# EAGLE board TPA6138A2_headphone_drvr (EAGLE 5.11)
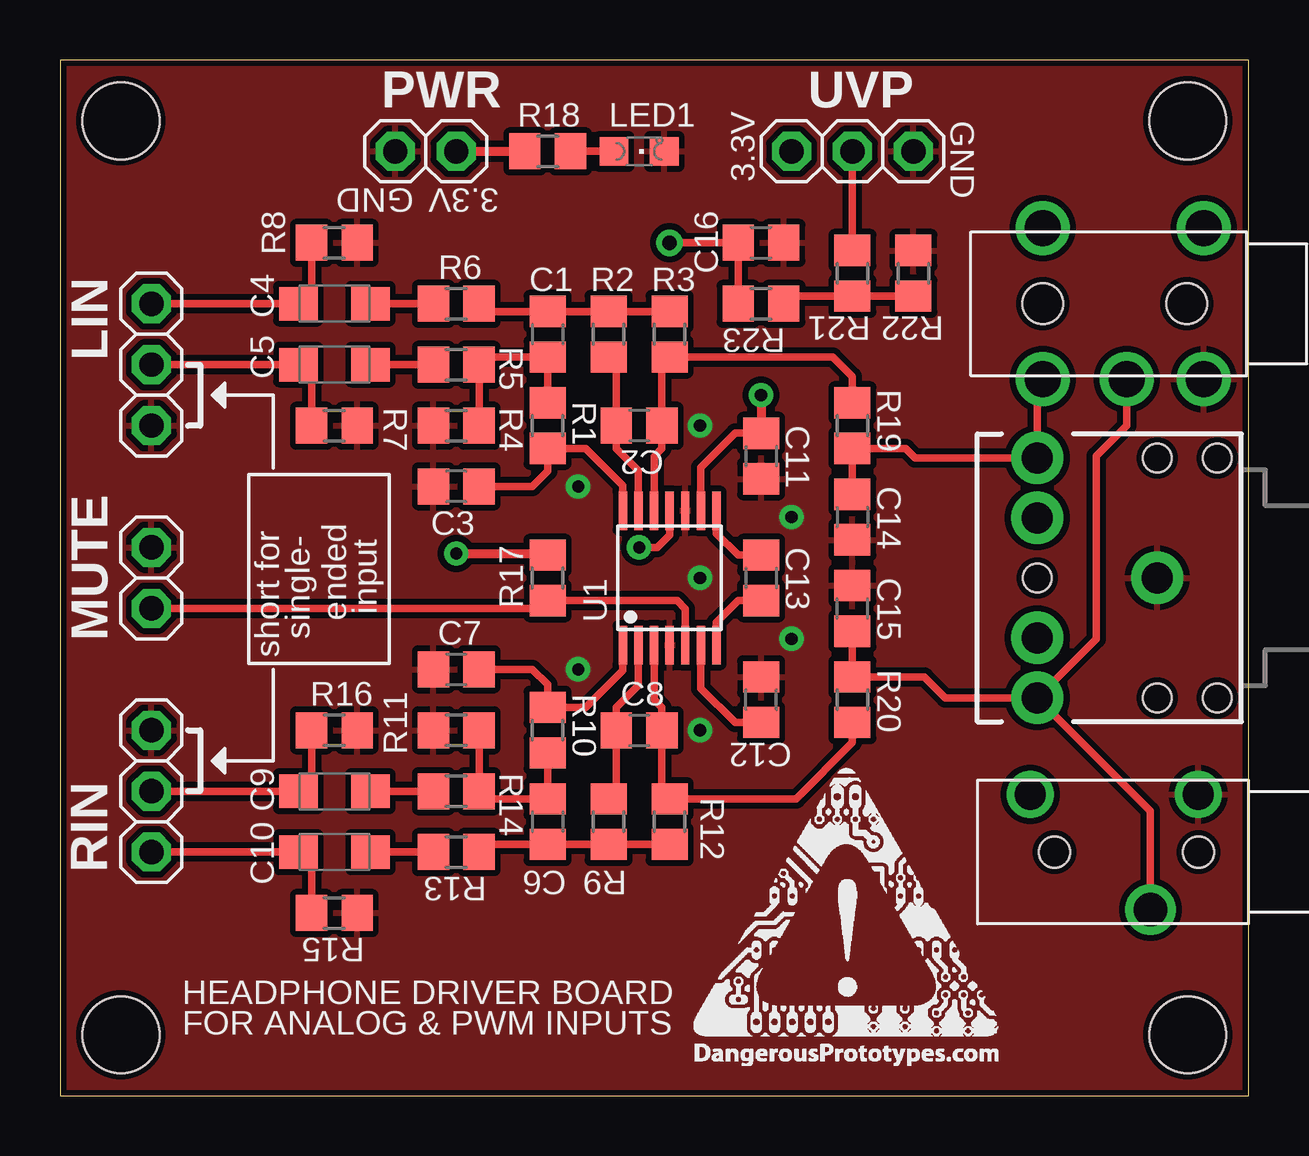
[diagram p0: board, top side]
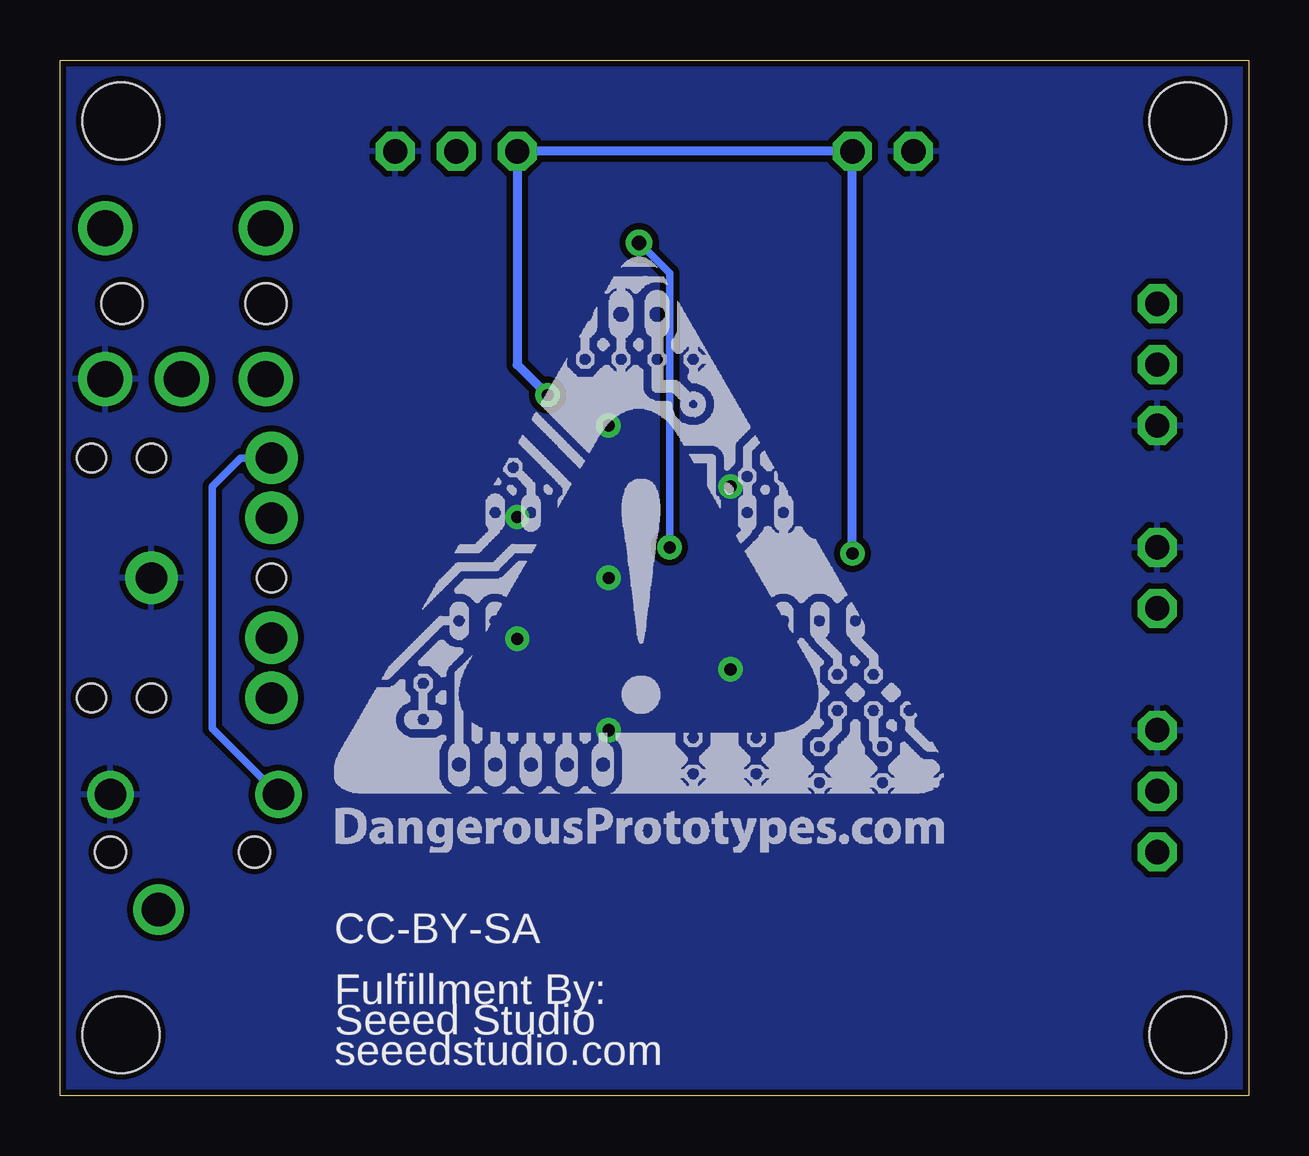
[diagram p1: board, bottom side, seen from below]

Size 49.53 x 43.18 mm. Coordinates in mm from the lower left corner, seen from the top.
Outline: 0,0 49.53,0 49.53,43.18 0,43.18 0,0
Copper layers (1*16): Top 0.035mm / dielectric 1.5mm / Bottom 0.035mm
Design rules "SparkFun": minimum track width 8mil, minimum drill 20mil, track to track 8mil, track to pad 8mil, pad to pad 8mil, via to via 8mil, smd to smd 8mil, copper to edge 10mil, drill to drill 8mil, minimum pad ring 12mil, minimum via ring 10mil, stop-mask expansion 4mil, vias tented up to drill 25mil, thermal gap 10mil
Holes 3.2 mm at 2.54,40.64 46.99,40.64 2.54,2.54 46.99,2.54

## Footprints (pad centres in the part's own frame; a part is rotated, then mirrored left to right if it is on the bottom)
C805 = smd 1.3 x 1.5: 1 -0.95,0; 2 0.95,0
SMC_A = smd 1.6 x 1.4: + -1.5,0; - 1.5,0
AUDIO-JACK = drill 1.3 pad 2.184 round: RING 5,5; RSH 5,2.5; SLEEVE 0,0; TIP 5,-5; TSH 5,-2.5 | hole 1.2: 0,5; -2.5,5; -2.5,-5; 0,-5; 5,0
AUDIO-JACK2 = drill 1.3 round: 1 2.1,-2.4; 3 9.1,-2.4 | drill 1.4 round: 2 4.1,2.4 | hole 1.3: 2.1,0; 8.1,0
AUDIO-JACK1 = drill 1.5 round: 1 -3.2,3.15; 1A -3.2,-3.15; 2 0,3.15; 3 3.5,3.15; 3A 3.5,-3.15 | hole 1.7: -2.5,0; 3.5,0
LED-805 = smd 1.2 x 1.2: A 0,-1.05; C 0,1.05
1X03 = drill 1.016 octagon: 1 -2.54,0; 2 0,0; 3 2.54,0
1X02 = drill 1.016 octagon: 1 -1.27,0; 2 1.27,0
R805 = smd 1.3 x 1.5: 1 -0.95,0; 2 0.95,0
TSSOP14 = smd 0.35 x 1.6: 1 -1.95,-2.8; 2 -1.3,-2.8; 3 -0.65,-2.8; 4 0,-2.8; 5 0.65,-2.8; 6 1.3,-2.8; 7 1.95,-2.8; 8 1.95,2.8; 9 1.3,2.8; 10 0.65,2.8; 11 0,2.8; 12 -0.65,2.8; 13 -1.3,2.8; 14 -1.95,2.8

## Placement (x,y rotation side)
C1  180pF  [C805]  20.32,31.75 270 top
C2  47pF  [C805]  24.13,27.94 180 top
C3  47pF  [C805]  16.51,25.4 180 top
C4  2.2uF  [SMC_A]  11.43,33.02 0 top
C5  2.2uF  [SMC_A]  11.43,30.48 0 top
C6  180pF  [C805]  20.32,11.43 270 top
C7  47pF  [C805]  16.51,17.78 0 top
C8  47pF  [C805]  24.13,15.24 0 top
C9  2.2uF  [SMC_A]  11.43,12.7 0 top
C10  2.2uF  [SMC_A]  11.43,10.16 0 top
C11  1uF  [C805]  29.21,26.67 270 top
C12  1uF  [C805]  29.21,16.51 90 top
C13  1uF  [C805]  29.21,21.59 270 top
C14  1nF  [C805]  33.02,24.13 270 top
C15  1nF  [C805]  33.02,20.32 90 top
C16  [C805]  29.21,35.56 0 top
HEADPHONE  [AUDIO-JACK]  45.72,21.59 180 top
J1  AUDIO-JACK2  [AUDIO-JACK2]  49.53,10.16 180 top
J2  AUDIO-JACK1  [AUDIO-JACK1]  44.45,33.02 180 top
LED1  [LED-805]  24.13,39.37 270 top
LIN  [1X03]  3.81,30.48 270 top
MUTE  [1X02]  3.81,21.59 90 top
PWR  [1X02]  15.24,39.37 180 top
R1  43K  [R805]  20.32,27.94 270 top
R2  43K  [R805]  22.86,31.75 270 top
R3  30K  [R805]  25.4,31.75 270 top
R4  30K  [R805]  16.51,27.94 0 top
R5  15K  [R805]  16.51,30.48 0 top
R6  15K  [R805]  16.51,33.02 0 top
R7  100K  [R805]  11.43,27.94 180 top
R8  100K  [R805]  11.43,35.56 180 top
R9  43K  [R805]  22.86,11.43 90 top
R10  43K  [R805]  20.32,15.24 90 top
R11  30K  [R805]  16.51,15.24 0 top
R12  30K  [R805]  25.4,11.43 90 top
R13  15K  [R805]  16.51,10.16 0 top
R14  15K  [R805]  16.51,12.7 0 top
R15  100K  [R805]  11.43,7.62 180 top
R16  100K  [R805]  11.43,15.24 180 top
R17  10k  [R805]  20.32,21.59 90 top
R18  10k  [R805]  20.32,39.37 180 top
R19  10  [R805]  33.02,27.94 270 top
R20  10  [R805]  33.02,16.51 90 top
R21  [R805]  33.02,34.29 270 top
R22  [R805]  35.56,34.29 270 top
R23  [R805]  29.21,33.02 0 top
RIN  [1X03]  3.81,12.7 270 top
U1  TPA6138A2PW  [TSSOP14]  25.4,21.59 0 top
U$1  [DP_LOGO_ART_1X1]  38.1,10.16 0 bottom
U$2  [DP_LOGO_ART_0.5X0.5]  26.42,1.27 0 top
UVP  [1X03]  33.02,39.37 0 top

## Library data of the parts
C1-C16 J1 J2 LED1 R1-R23 U1 U$1 U$2 = dp_devices
HEADPHONE = SparkFun
LIN MUTE PWR RIN UVP = pinhead

## Nets
+3V3: C11.1 PWR.1 R17.2 R18.2 U1.9 UVP.1
GND: C3.2 C7.1 C11.2 C12.2 C14.2 C15.2 C16.2 HEADPHONE.SLEEVE J1.1 J2.1 LED1.C LIN.3 MUTE.2 PWR.2 R4.1 R7.1 R8.1 R11.1 R15.1 R16.1 R22.1 RIN.1 U1.4 U1.10 UVP.3
N$1: C2.2 R2.2 U1.13
N$2: C3.1 R1.2 U1.14
N$3: C1.1 R2.1 R3.1 R6.2
N$4: C1.2 R1.1 R4.2 R5.2
N$5: C2.1 R3.2 R19.1 U1.12
N$6: C4.- R6.1
N$7: C5.- R5.1
N$8: C4.+ LIN.1 R8.2
N$9: C5.+ LIN.2 R7.2
N$10: C8.1 R9.2 U1.2
N$11: C7.2 R10.2 U1.1
N$12: C6.1 R10.1 R11.2 R14.2
N$13: C6.2 R9.1 R12.1 R13.2
N$14: C8.2 R12.2 R20.1 U1.3
N$15: C9.- R14.1
N$16: C10.- R13.1
N$17: C9.+ R16.2 RIN.2
N$18: C10.+ R15.2 RIN.3
N$19: C12.1 U1.6
N$20: MUTE.1 R17.1 U1.5
N$21: C13.1 U1.8
N$22: C13.2 U1.7
N$23: LED1.A R18.1
N$24: C14.1 HEADPHONE.TIP J1.3 J2.3 R19.2
N$25: C15.1 HEADPHONE.RING J1.2 J2.2 R20.2
N$26: C16.1 R23.1 U1.11
N$27: R21.2 R22.2 R23.2
N$29: R21.1 UVP.2

## Tracks (layer width: path | path; a pad name or v marks a point on that pad's centre or on a via)
+3V3  (via drill 0.51)
  Top 0.305: U1.9 26.7,26.19 28.13,27.62 C11.1
  Top 0.381: v29.21,29.21 C11.1 | PWR.1 R18.2 | v16.51,22.61 20.25,22.61 R17.2
  Bottom 0.381: v29.21,29.21 30.48,30.48 UVP.1 PWR.1 v16.51,22.61
GND  (via drill 0.51)
  other vias: 21.59,17.78 21.59,25.4 26.67,15.24 30.48,19.05 30.48,24.13 26.67,21.59 26.67,27.94
  pour Bottom (isolate 0.254): 0,43.18 49.53,43.18 49.53,0 0,0
  pour Top (isolate 0.254): 0,43.18 49.53,43.18 49.53,0 0,0
N$1
  Top 0.305: U1.13 24.1,26.07 23.18,26.98 C2.2 23.18,30.48 R2.2
N$2
  Top 0.305: U1.14 23.45,25.45 21.91,26.99 R1.2 20.32,26.04 19.68,25.4 C3.1
N$3
  Top 0.305: R3.1 R2.1 C1.1 17.78,32.7 R6.2
N$4
  Top 0.305: R1.1 C1.2 17.78,30.8 R5.2 R4.2
N$5
  Top 0.305: U1.12 24.75,26.66 25.08,26.98 C2.1 25.08,30.48 R3.2 32.19,30.8 33.02,29.97 R19.1
N$6
  Top 0.305: C4.- R6.1
N$7
  Top 0.305: C5.- R5.1
N$8
  Top 0.305: R8.2 10.48,33.57 C4.+ LIN.1
N$9
  Top 0.305: R7.2 10.48,29.93 C5.+ LIN.2
N$10
  Top 0.305: U1.2 24.1,17.11 23.18,16.2 C8.1 23.18,12.7 R9.2
N$11
  Top 0.305: U1.1 23.45,17.73 21.91,16.19 R10.2 20.32,17.14 19.68,17.78 C7.2
N$12
  Top 0.305: R10.1 C6.1 17.78,12.38 R14.2 R11.2
N$13
  Top 0.305: R12.1 R9.1 C6.2 17.78,10.48 R13.2
N$14
  Top 0.305: U1.3 24.75,16.52 25.08,16.2 C8.2 25.08,12.7 R12.2 30.67,12.38 33.02,14.73 R20.1
N$15
  Top 0.305: C9.- R14.1
N$16
  Top 0.305: C10.- R13.1
N$17
  Top 0.305: R16.2 10.48,13.25 C9.+ RIN.2
N$18
  Top 0.305: R15.2 10.48,9.61 C10.+ RIN.3
N$19
  Top 0.305: U1.6 26.7,16.99 28.13,15.56 C12.1
N$20
  Top 0.305: U1.5 26.05,20.3 25.71,20.64 R17.1 20,20.32 MUTE.1
N$21
  Top 0.305: U1.8 27.35,23.45 28.26,22.54 C13.1
N$22
  Top 0.305: C13.2 28.26,20.64 27.35,19.73 U1.7
N$23
  Top 0.305: R18.1 LED1.A
N$24
  Top 0.305: C14.1 R19.2 35.24,26.99 35.64,26.59 HEADPHONE.TIP 40.72,29.64 J2.3
  Bottom 0.305: HEADPHONE.TIP 41.99,26.59 43.18,25.4 43.18,15.31 J1.3
N$25
  Top 0.305: C15.1 R20.2 36.02,17.46 36.89,16.59 HEADPHONE.RING | J2.2 44.45,27.94 43.18,26.67 43.18,19.05 HEADPHONE.RING | J1.2 45.43,11.88 HEADPHONE.RING
N$26  (via drill 0.51, 0.6)
  Top 0.305: R23.1 C16.1 v25.4,35.56 | v24.13,22.86 24.89,22.86 25.4,23.37 U1.11
  Bottom 0.305: v24.13,22.86 24.13,34.29 v25.4,35.56
N$27
  Top 0.305: R22.2 R21.2 30.48,33.34 R23.2
N$29
  Top 0.305: R21.1 UVP.2

## Text on the board
tNames: GND | GND | 3.3V | 3.3V | ended | input | single- | short for | HEADPHONE DRIVER BOARD | FOR ANALOG & PWM INPUTS
bNames: CC-BY-SA | Fulfillment By: | Seeed Studio | seeedstudio.com